# EAGLE board ME433_schematic (EAGLE 9.6.2)
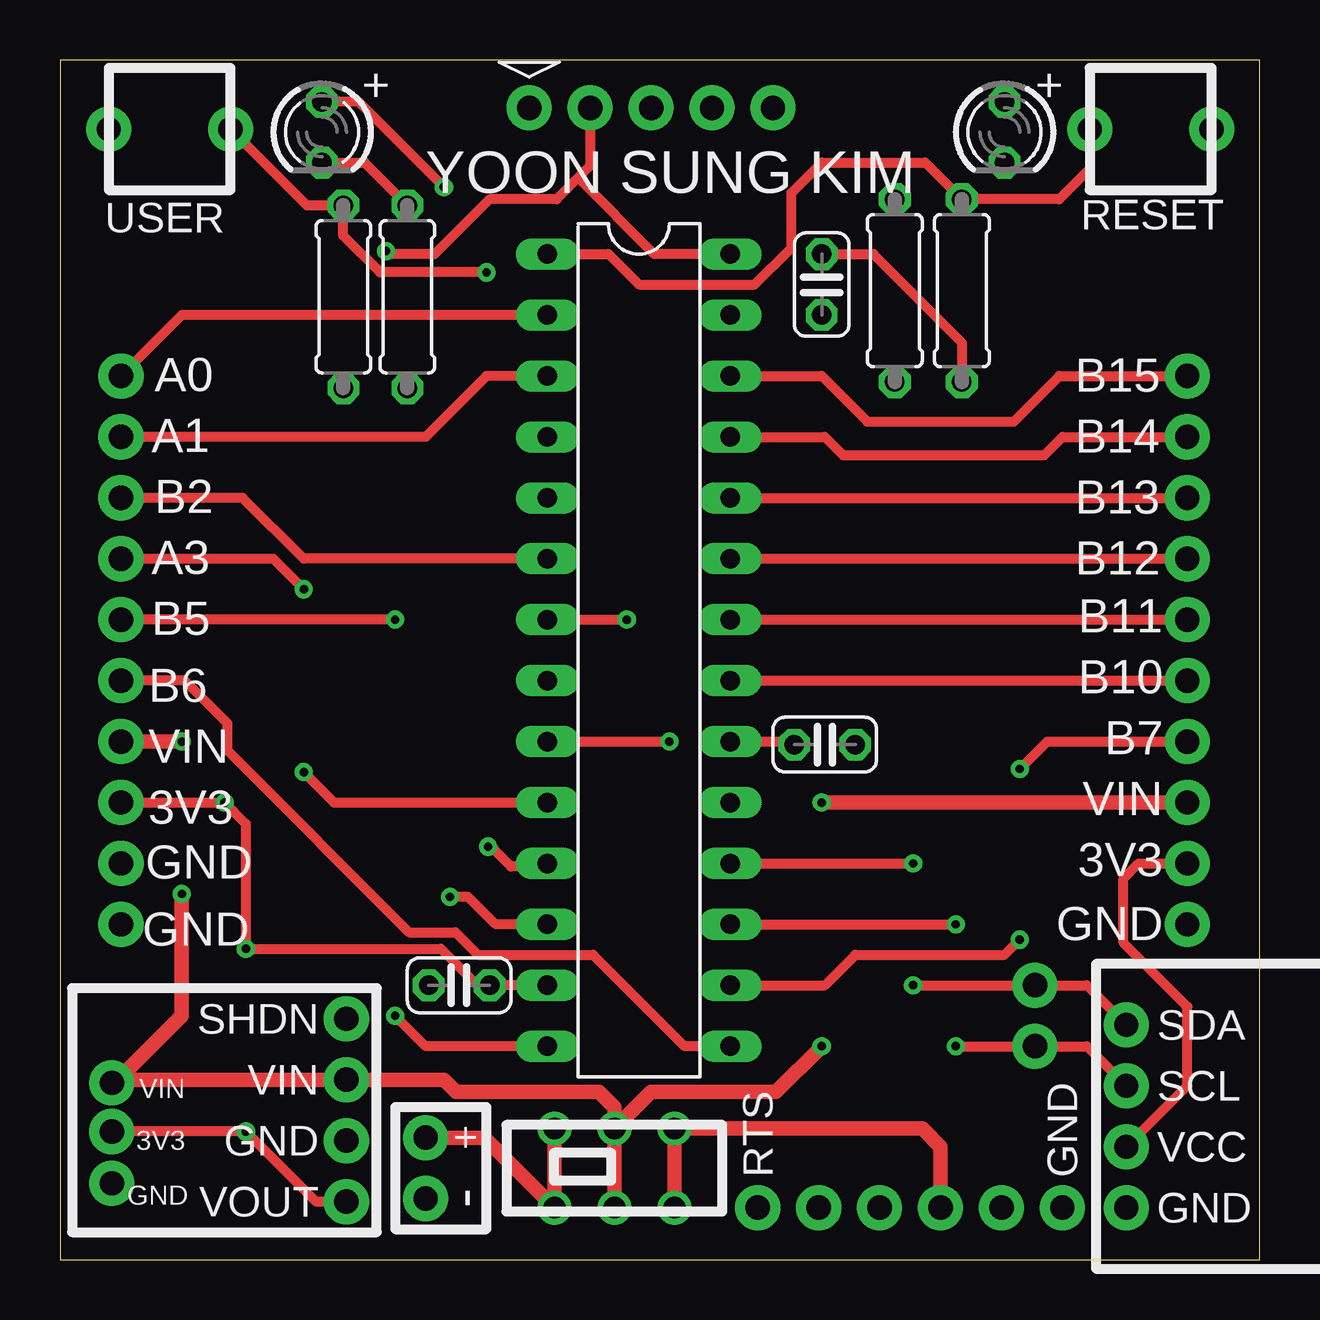
[diagram p0: board, top side]
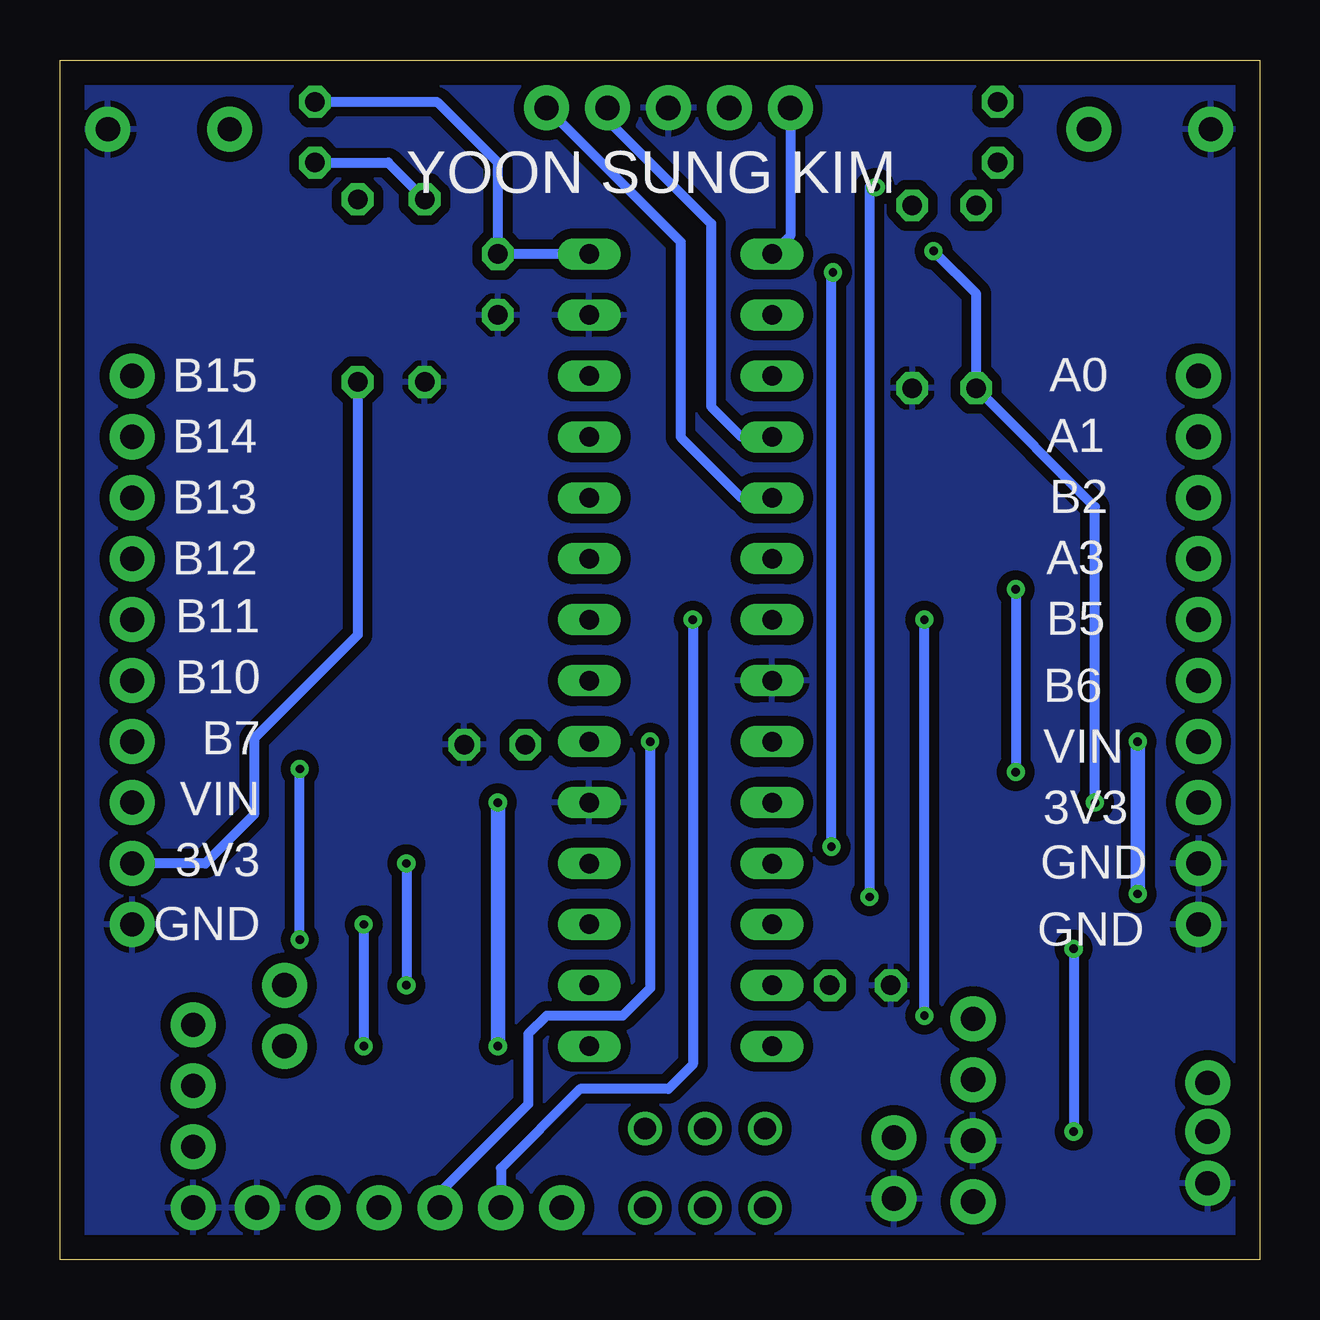
[diagram p1: board, bottom side, seen from below]

Size 50 x 50 mm. Coordinates in mm from the lower left corner, seen from the top.
Outline: 0,0 50,0 50,50 0,50 0,0
Copper layers (1*16): Top 0.035mm / dielectric 1.5mm / Bottom 0.035mm
Design rules "default": minimum track width 6mil, minimum drill 0.35mm, track to track 6mil, track to pad 6mil, pad to pad 6mil, via to via 6mil, smd to smd 6mil, copper to edge 40mil, drill to drill 6mil, minimum pad ring 10mil, minimum via ring 8mil, stop-mask expansion 4mil, vias tented up to drill 0mil, thermal gap 10mil

## Footprints (pad centres in the part's own frame; a part is rotated, then mirrored left to right if it is on the bottom)
C025-024X044 = drill 0.813 octagon: 1 -1.27,0; 2 1.27,0
LED3MM = drill 0.813 octagon: A -1.27,0; K 1.27,0
0207/7 = drill 0.813 octagon: 1 -3.81,0; 2 3.81,0
DIL28-3 = drill 0.813 long: 1 -16.51,-3.81; 2 -13.97,-3.81; 3 -11.43,-3.81; 4 -8.89,-3.81; 5 -6.35,-3.81; 6 -3.81,-3.81; 7 -1.27,-3.81; 8 1.27,-3.81; 9 3.81,-3.81; 10 6.35,-3.81; 11 8.89,-3.81; 12 11.43,-3.81; 13 13.97,-3.81; 14 16.51,-3.81; 15 16.51,3.81; 16 13.97,3.81; 17 11.43,3.81; 18 8.89,3.81; 19 6.35,3.81; 20 3.81,3.81; 21 1.27,3.81; 22 -1.27,3.81; 23 -3.81,3.81; 24 -6.35,3.81; 25 -8.89,3.81; 26 -11.43,3.81; 27 -13.97,3.81; 28 -16.51,3.81
BAT = drill 1.016 pad 1.88: 1 -1.27,0; 2 1.27,0
SLIDE = drill 0.9: 1 -2.5,-1.65; 2 0,-1.65; 3 2.5,-1.65; 4 2.5,1.65; 5 0,1.65; 6 -2.5,1.65
VREG = drill 1.016 pad 1.88: 1 -3.81,0; 2 -1.27,0; 3 1.27,0; 4 3.81,0
USB2UART = drill 1.016 pad 1.88: 1 -6.35,0; 2 -3.81,0; 3 -1.27,0; 4 1.27,0; 5 3.81,0; 6 6.35,0
SNAP = drill 1.016 pad 1.88: 1 -5.08,0; 2 -2.54,0; 3 0,0; 4 2.54,0; 5 5.08,0
DISPLAY = drill 1.016 pad 1.88: 1 0,-3.81; 2 0,-1.27; 3 0,1.27; 4 0,3.81
BUTTON = drill 1.016 pad 1.88: 1 -2.54,0; 2 2.54,0
ONE = drill 1.016 pad 1.88: P$1 0,0
FIVE = drill 1.016 pad 1.88: 1 -5.08,0; 2 -2.54,0; 3 0,0; 4 2.54,0; 5 5.08,0

## Placement (x,y rotation side)
C1  0.1uF  [C025-024X044]  31.75,40.64 270 top
C2  0.1uF  [C025-024X044]  16.64,11.43 180 top
C3  10uF  [C025-024X044]  31.88,21.46 0 top
LED1  RED  [LED3MM]  39.37,46.99 270 top
LED2  GREEN  [LED3MM]  10.92,46.99 270 top
R1  330  [0207/7]  34.8,40.39 90 top
R2  330  [0207/7]  14.48,40.13 90 top
R3  10k  [0207/7]  37.59,40.39 270 top
R4  10k  [0207/7]  11.81,40.13 270 top
U$1  PIC32  [DIL28-3]  24.13,25.4 270 top
U$2  BAT  [BAT]  15.24,3.81 90 top
U$3  SLIDE  [SLIDE]  23.11,3.81 0 top
U$4  VREG  [VREG]  11.94,6.22 90 top
U$5  USB2UART  [USB2UART]  35.43,2.16 180 top
U$6  SNAP  [SNAP]  24.64,48.01 0 top
U$7  DISPLAY  [DISPLAY]  44.45,5.97 0 top
U$8  RESET  [BUTTON]  45.47,47.12 0 top
U$9  USER  [BUTTON]  4.57,47.12 180 top
U$10  ONE  [ONE]  40.64,11.43 0 top
U$11  ONE  [ONE]  40.64,8.89 0 top
U$12  FIVE  [FIVE]  46.99,31.75 270 top
U$13  FIVE  [FIVE]  46.99,19.05 270 top
U$14  FIVE  [FIVE]  2.54,19.05 270 top
U$15  FIVE  [FIVE]  2.54,31.75 270 top
U$16  ONE  [ONE]  2.16,7.37 0 top
U$17  ONE  [ONE]  2.16,5.33 0 top
U$18  ONE  [ONE]  2.16,3.17 0 top

## Library data of the parts
C1-C3 = me433-pcblib; SPICEPREFIX: C
LED1 LED2 U$1-U$18 = me433-pcblib
R1-R4 = me433-pcblib; SPICEPREFIX: R

## Nets
+3V3: C1.1 C2.1 LED1.A R3.2 R4.2 U$1.13 U$1.28 U$4.1 U$6.2 U$7.2 U$13.4 U$14.3 U$17.P$1
+5V: U$3.3 U$3.4 U$5.3
A0: U$1.2 U$15.1
A1: U$1.3 U$15.2
A3: U$1.10 U$15.4
A4: LED2.A U$1.12
B2: U$1.6 U$15.3
B4: R4.1 U$1.11 U$9.1
B5: U$1.14 U$15.5
B6: U$1.15 U$14.1
B7: U$1.16 U$13.2
B10: U$1.21 U$13.1
B11: U$1.22 U$12.5
B12: U$1.23 U$12.4
B13: U$1.24 U$12.3
B14: U$1.25 U$12.2
B15: U$1.26 U$12.1
GND: C1.2 C2.2 C3.2 R1.1 R2.1 U$1.8 U$1.19 U$1.27 U$2.1 U$4.2 U$5.1 U$6.3 U$7.1 U$8.2 U$9.2 U$13.5 U$14.4 U$14.5 U$18.P$1
MCLR: R3.1 U$1.1 U$6.1 U$8.1
N$1: LED1.K R1.2
N$2: U$2.2 U$3.1 U$3.6
N$4: LED2.K R2.2
N$6: C3.1 U$1.20
PGC: U$1.5 U$6.5
PGD: U$1.4 U$6.4
SCL: U$1.17 U$7.3 U$11.P$1
SDA: U$1.18 U$7.4 U$10.P$1
U1RX: U$1.9 U$5.4
U1TX: U$1.7 U$5.5
VIN: U$3.2 U$3.5 U$4.3 U$13.3 U$14.2 U$16.P$1

## Tracks (layer width: path | path; a pad name or v marks a point on that pad's centre or on a via)
+3V3  (via drill 0.35)
  Top 0.406: U$1.13 C2.1 17.4,11.43 15.88,12.95 v7.75,12.95 7.75,18.16 v6.86,19.05 U$14.3 | R3.2 37.59,38.23 33.91,41.91 C1.1 | U$7.2 46.99,7.24 46.99,10.54 44.32,13.21 44.32,15.88 44.96,16.51 U$13.4 | U$4.1 10.67,2.41 v7.75,5.33 U$17.P$1 | U$6.2 22.1,45.59 21.59,45.09 | v13.59,42.04 13.72,41.91 15.62,41.91 17.91,44.2 20.7,44.2 21.59,45.09 | U$1.28 24.77,41.91 21.59,45.09
  Bottom 0.406: U$1.28 C1.1 31.75,45.72 34.29,48.26 LED1.A | v7.75,12.95 v7.75,5.33 | v6.86,19.05 6.86,31.37 R4.2 11.81,40.26 v13.59,42.04 | R3.2 37.59,26.04 41.91,21.72 41.91,18.54 43.94,16.51 U$13.4
+5V
  Top 0.61: U$3.3 U$3.4 35.94,5.46 36.7,4.7 U$5.3
A0
  Top 0.406: U$1.2 5.08,39.37 U$15.1
A1
  Top 0.406: U$1.3 17.78,36.83 15.24,34.29 U$15.2
A3  (via drill 0.35)
  Top 0.406: U$15.4 8.89,29.21 v10.16,27.94 | v10.16,20.32 11.43,19.05 U$1.10
  Bottom 0.406: v10.16,27.94 v10.16,20.32
A4  (via drill 0.35)
  Top 0.406: U$1.12 18.16,13.97 17.02,15.11 v16.26,15.11 | v16,44.7 12.45,48.26 LED2.A
  Bottom 0.406: v16,44.7 16.26,44.7 v16.26,15.11
B2
  Top 0.406: U$1.6 10.16,29.21 7.62,31.75 U$15.3
B4  (via drill 0.35)
  Top 0.406: U$9.1 10.29,43.94 R4.1 11.81,42.67 13.34,41.15 v17.78,41.15 | U$1.11 20.19,16.38 18.8,16.38 17.91,17.27 v17.84,17.21
  Bottom 0.406: v17.84,17.21 17.84,41.08 v17.78,41.15
B5  (via drill 0.35)
  Top 0.406: U$1.14 15.24,8.89 v13.97,10.16 | v13.97,26.67 U$15.5
  Bottom 0.406: v13.97,10.16 v13.97,26.67
B6
  Top 0.406: U$1.15 26.04,8.89 22.23,12.7 17.43,12.7 16.49,13.64 14.55,13.64 6.99,21.21 6.99,22.35 5.21,24.13 U$14.1
B7  (via drill 0.35)
  Top 0.406: v40.01,13.34 39.37,12.7 33.15,12.7 31.88,11.43 U$1.16 | v40.01,20.45 41.15,21.59 U$13.2
  Bottom 0.406: v40.01,13.34 v40.01,20.45
B10
  Top 0.406: U$1.21 U$13.1
B11
  Top 0.406: U$1.22 U$12.5
B12
  Top 0.406: U$1.23 U$12.4
B13
  Top 0.406: U$1.24 U$12.3
B14
  Top 0.406: U$12.2 41.78,34.29 41.02,33.53 32.64,33.53 31.88,34.29 U$1.25
B15
  Top 0.406: U$1.26 31.75,36.83 33.66,34.92 39.75,34.92 41.66,36.83 U$12.1
GND
  pour Bottom (isolate 0.406): -2.54,52.07 -2.54,-2.54 52.07,-2.54 52.07,52.07
MCLR
  Top 0.406: U$8.1 42.93,45.47 41.66,44.2 R3.1 | U$1.1 22.86,41.91 24.13,40.64 28.96,40.64 30.48,42.16 30.48,44.45 31.75,45.72 36.07,45.72 R3.1 | 37.59,43.69 R3.1
  Bottom 0.406: U$1.1 19.56,42.67 U$6.1
N$1
  Bottom 0.406: R1.2 36.32,45.72 LED1.K
N$2
  Top 0.61: U$3.6 U$3.1 17.69,5.08 U$2.2
N$4
  Top 0.406: LED2.K 12.7,45.72 R2.2
N$6
  Top 0.406: U$1.20 30.48,21.59 C3.1
PGC
  Bottom 0.406: U$1.5 21.59,31.75 24.13,34.29 24.13,42.42 U$6.5
PGD
  Bottom 0.406: U$6.4 27.18,47.5 22.86,43.18 22.86,35.56 21.59,34.29 U$1.4
SCL  (via drill 0.35)
  Top 0.406: U$1.17 v37.34,13.97 | v37.34,8.89 U$11.P$1 42.8,8.89 U$7.3
  Bottom 0.406: v37.34,13.97 v37.34,8.89
SDA  (via drill 0.35)
  Top 0.406: U$1.18 v35.56,16.51 | v35.56,11.43 U$10.P$1 42.8,11.43 U$7.4
  Bottom 0.406: v35.56,16.51 v35.56,11.43
U1RX  (via drill 0.35)
  Top 0.406: U$1.9 v25.4,21.59
  Bottom 0.406: U$5.4 34.16,2.79 30.48,6.48 30.48,9.4 29.72,10.16 26.54,10.16 25.4,11.3 v25.4,21.59
U1TX  (via drill 0.35)
  Top 0.406: U$1.7 v23.62,26.67
  Bottom 0.406: v23.62,26.67 23.62,8.13 24.64,7.11 28.32,7.11 31.62,3.81 U$5.5
VIN  (via drill 0.35)
  Top 0.61: U$3.5 U$3.2 | U$3.5 23.11,6.35 22.48,6.99 16.51,6.99 16,7.49 12.7,7.49 U$4.3 2.29,7.49 U$16.P$1 2.29,7.37 5.08,10.16 v5.08,15.24 | U$3.5 24.64,6.99 29.84,6.99 v31.75,8.89 | v31.75,19.05 U$13.3 | U$14.2 v5.08,21.59
  Bottom 0.61: v31.75,8.89 v31.75,19.05 | v5.08,21.59 v5.08,15.24

## Text on the board
tPlace: + | + | YOON SUNG KIM | B15 | A0 | B14 | A1 | B13 | B2 | B12 | A3 | B11 | B5 | B10 | B6 | B7 | VIN | VIN | 3V3 | 3V3 | GND | GND | GND | VIN | 3V3 | GND
bPlace: YOON SUNG KIM | B15 | A0 | B14 | A1 | B13 | B2 | B12 | A3 | B11 | B5 | B10 | B6 | B7 | VIN | VIN | 3V3 | 3V3 | GND | GND | GND
200bmp: C:/Users/bluew/Downloads/Bowl of Rice.bmp